# Altium PCB Constant Power Charging Board 4.5.PcbDoc
Units mm, origin at the board's own origin, x right, y up, seen from the top; angles counter-clockwise.
Board outline 99.72 x 47.55 mm, 2 copper layers (Top Layer, Bottom Layer), stack 0.533 mm thick; 62 components, 32 nets, 180 pads, 93 vias.
Unrouted connection lines stored in the file: 109.
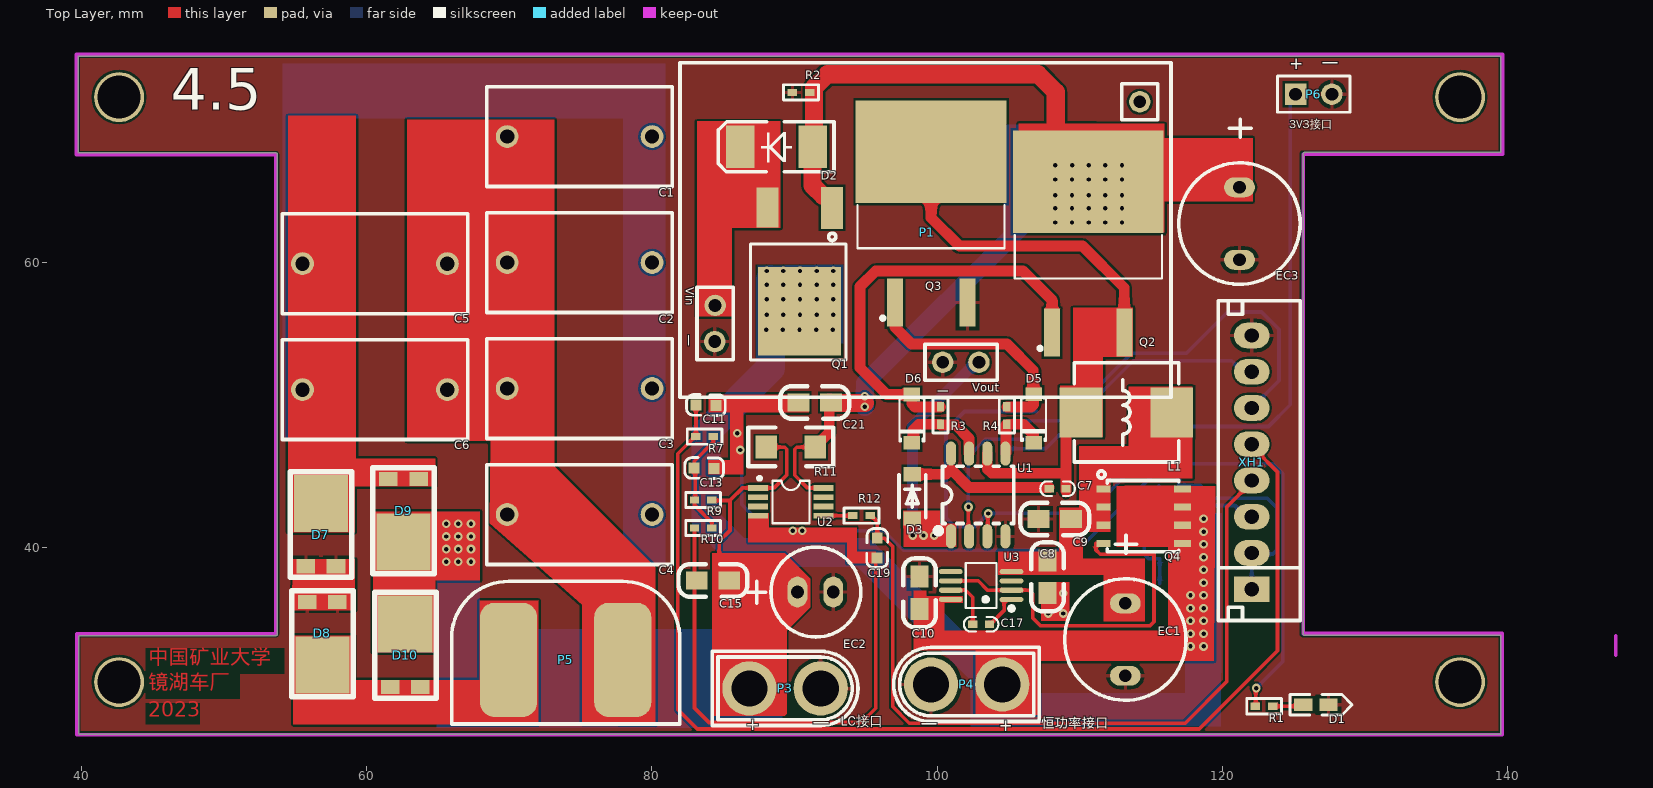
[diagram p0: Top Layer view]
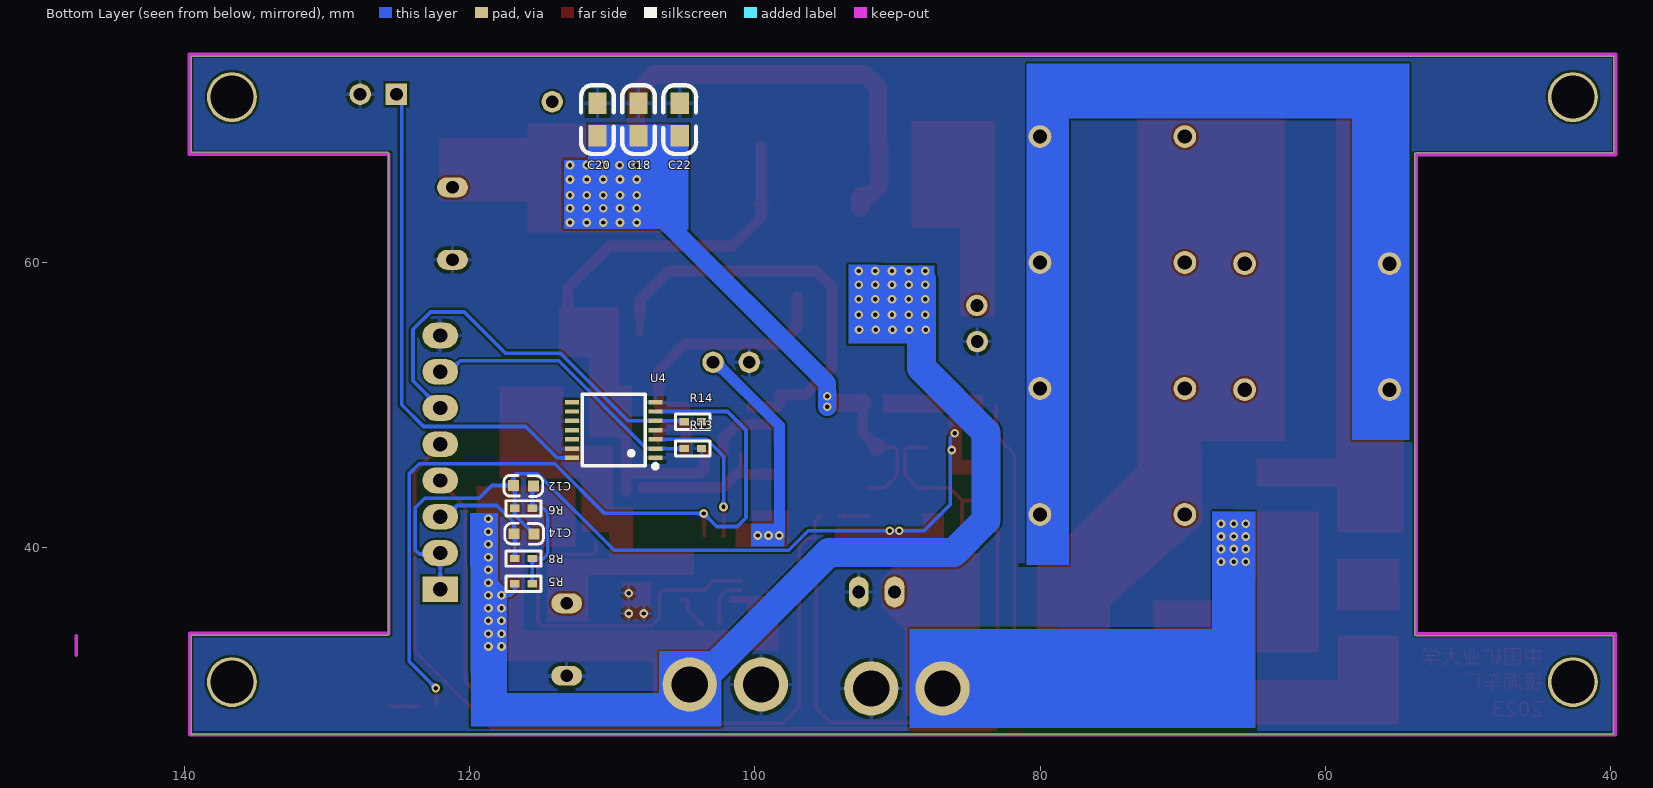
[diagram p1: Bottom Layer view, seen from below]
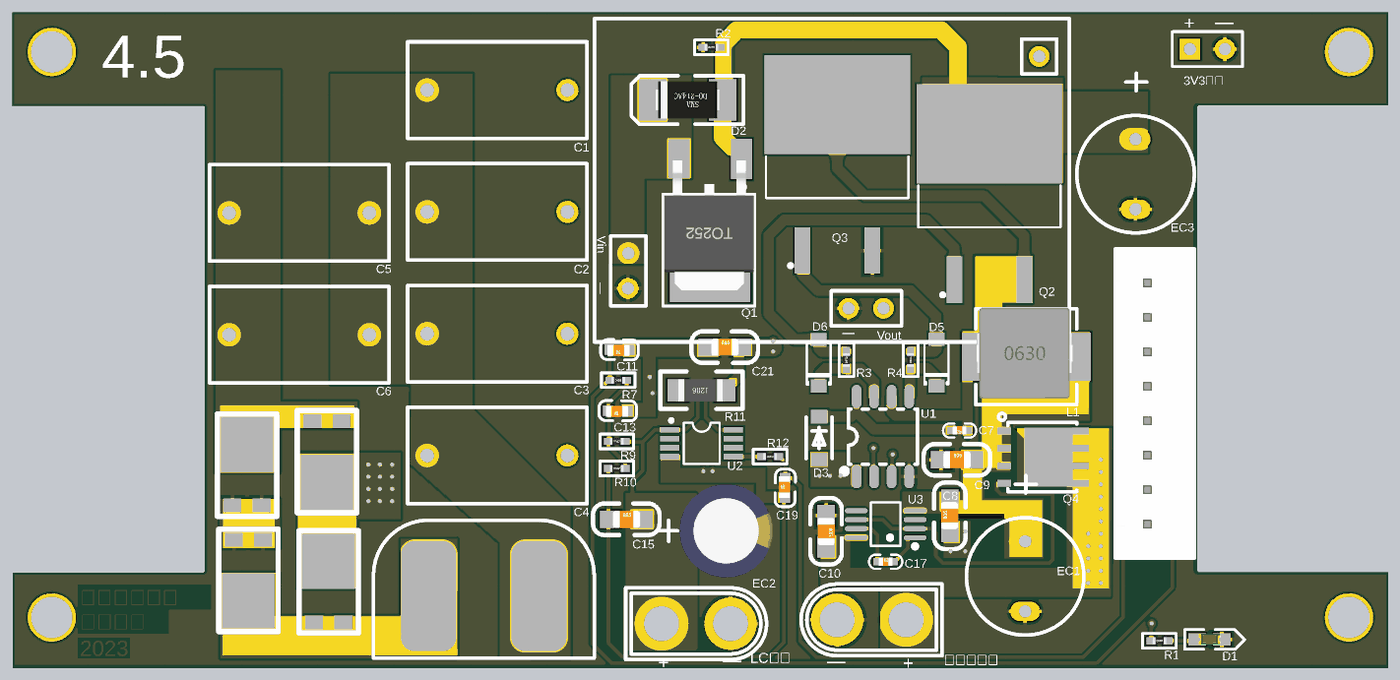
[diagram p2: 3D render of the assembled board from above, using the file's embedded part models]
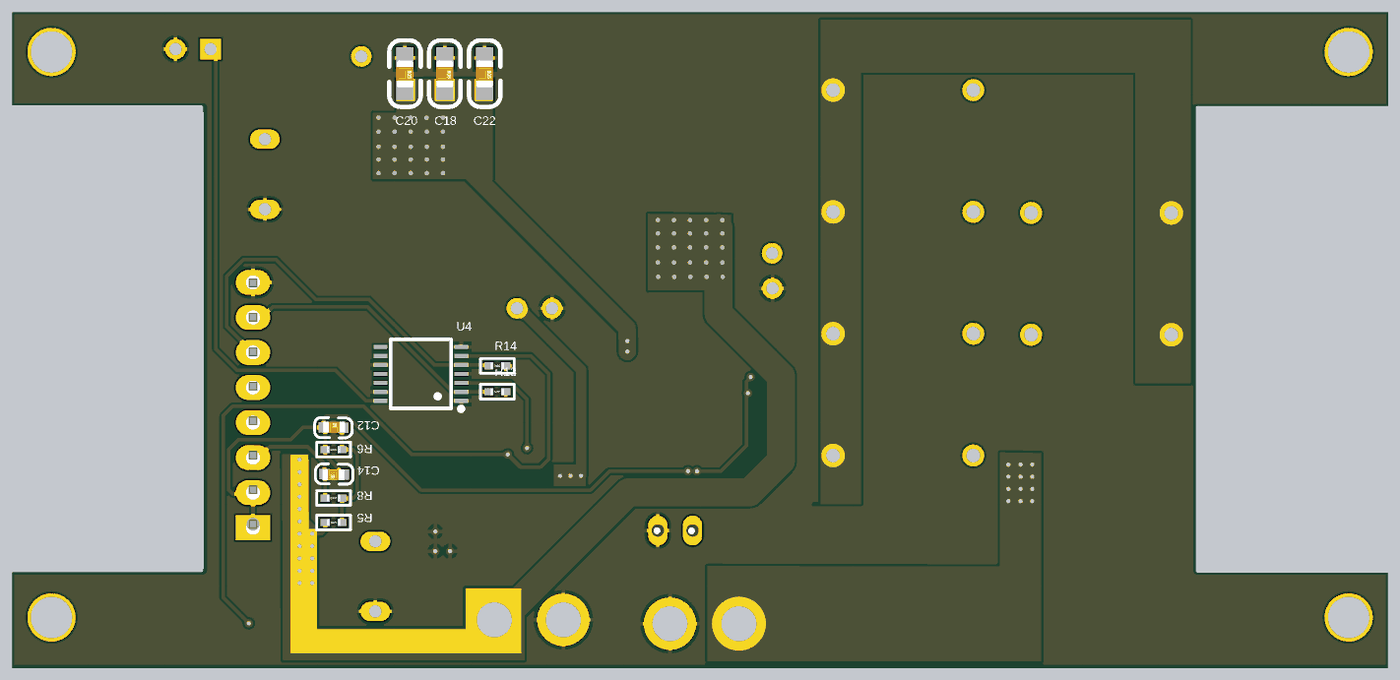
[diagram p3: 3D render of the assembled board from below, using the file's embedded part models]

## Layer stack, top to bottom
Top Solder: solder mask 0.0102, Solder Resist, Dk 3.5
Top Layer: signal copper 0.0356
Dielectric 2: prepreg 0.0711, PP-006, Dk 4.1
Dielectric 1: dielectric 0.32, FR-4, Dk 4.8
Dielectric 3: prepreg 0.0711, PP-006, Dk 4.1
Bottom Layer: signal copper 0.0356
Bottom Solder: solder mask 0.0102, Solder Resist, Dk 3.5

## Board outline
39.802,33.858 53.619,33.858 ccw(c53.619,33.985) 53.747,33.985 53.747,67.564 ccw(c53.619,67.564) 53.619,67.691 39.777,67.691 39.777,74.472 139.496,74.472 139.496,67.727 125.781,67.727 ccw(c125.781,67.6) 125.653,67.6 125.653,34 ccw(c125.781,34) 125.781,33.873 139.49,33.873 139.49,26.924 39.802,26.924

## Design rules (kind name [scope] priority, off if disabled: settings)
Clearance [All] p1: gap=0.152 ignorepadtopadclearanceinfootprint=FALSE except(0: Arc-Hole Track-Hole SMDPad-Hole THPad-Hole Via-Hole Fill-Hole Poly-Hole Region-Hole Text-Hole)
HoleToHoleClearance [All] p1: gap=0 allowstackedmicrovias=TRUE
MinimumSolderMaskSliver [All] p1: minsoldermaskwidth=0
PolygonConnect [All] p1: connectstyle=Relief reliefconductorwidth=0.254 reliefentries=4 polygonreliefangle="90 Angle" airgapwidth=0.254
RoutingVias [All] p1: holewidth=0.61 width=0.305 viastyle="Through Hole" minholewidth=0 minwidth=0 maxholewidth=1.27 maxwidth=1.27
SilkToSilkClearance [All] p1: silktosilkclearance=0
SilkToSolderMaskClearance [IsPad] p1: minsilkscreentomaskgap=0 clearancetoexposedcopper=TRUE
SolderMaskExpansion [All] p1: expansion=0.102
Width [All] p1: maxlimit=2.54 minlimit=0.102 preferedwidth=0.254 minimp=50.000000 maximp=50.000000 favimp=50.000000
26 further rules are at their usual default settings.

## Components (designator, comment, footprint, x,y, rotation, side; value= is the part's Value field where it differs from the comment)
C1 "3.3nF" "谐振电容 P=10" 74.93,68.834 r0 top
C2 "5.6nF" "谐振电容 P=10" 74.93,60.003 r0 top
C3 "5.6nF" "谐振电容 P=10" 74.93,51.173 r0 top
C4 "10nF" "谐振电容 P=10" 74.93,42.342 r0 top
C5 "12nF" "谐振电容 P=10" 60.579,59.927 r180 top
C6 "test" "谐振电容 P=10" 60.579,51.096 r180 top
C7 "1uF" 0402C 109.068,44.154 r180 top
C8 "10uF/50V" 0805C 107.712,36.85 r90 top
C9 "1uF/50V" 0805C 107.112,42.037 r0 top
C10 "10uF/50V" 0805C 98.764,37.978 r270 top
C11 "10uF" 0603C 84.486,49.978 r180 top
C12 "10uF" 0603C 116.922,44.383 r180 bottom
C13 "10uF" 0603C 84.359,45.559 r180 top
C14 "10uF" 0603C 115.463,40.961 r0 bottom
C15 "10uF/50V" 0805C 83.152,37.729 r0 top
C17 "2.2uF" 0402C 102.438,34.642 r0 top
C18 "10uF/50V" 0805C 108.135,71.153 r270 bottom
C19 "10uF" 0603C 95.762,39.288 r90 top
C20 "10uF/50V" 0805C 111.023,71.153 r270 bottom
C21 "10uF/50V" 0805C 90.284,50.204 r0 top
C22 "1uF/50V" 0805C 105.247,71.153 r270 bottom
D1 "LED" LED-0603B 125.654,29 r0 top
D2 "SS310" SMA/DO-214AC 91.135,68.123 r180 top
D3 "FR107W" FR107W 98.247,43.612 r270 top
D5 "L1N4148WT1G" L1N4148WT1G 106.756,49.073 r90 top
D6 "L1N4148WT1G" L1N4148WT1G 98.222,49.063 r90 top
D7 "FM10U100" FM10U100 56.794,40.772 r270 top
D8 "FM10U100" FM10U100 56.896,34.158 r90 top
D9 "FM10U100" FM10U100 62.586,42.769 r90 top
D10 "FM10U100" FM10U100 62.713,32.314 r270 top
EC1 "220uF 50V" DIP-EC8X12 113.182,36.119 r270 top
EC2 "100uF 50V" DIP-EC6.3X11 90.195,36.906 r0 top
EC3 "220uF 50V" DIP-EC8X12 121.183,65.278 r270 top
L1 "15uH" 0630L 110.211,49.505 r0 top
P1 "电源电路" 12V稳压电路 81.966,50.575 r0 top locked
P3 "LC接口" XT30U-M 89.332,30.15 r0 top
P4 "恒功率接口" XT30U-M 102.057,30.429 r180 top
P5 "线圈" 线圈接口 65.953,27.656 r0 top
P6 "Header 2" HDR1X2 125.12,71.806 r0 top
Q1 "AOD4189" TO252 92.507,63.839 r180 top
Q2 "HY3408B" TO-263-2L 110.592,60.373 r90 top
Q3 "HY3408B" TO-263-2L 99.568,62.49 r90 top
Q4 "TPH1R403NL_C83440" TPH1R403NL 114.428,42.227 r270 top
R1 "1k" 0402R 123.52,28.905 r180 top
R2 "10k" 0402R 89.84,71.933 r0 top
R3 "47" 0402R 100.228,48.666 r90 top
R4 "47" 0402R 104.877,48.666 r90 top
R5 "39k" 0402R 115.594,37.49 r0 bottom
R6 "2.4k" 0402R 116.813,42.774 r180 bottom
R7 "1k" 0402R 83.083,47.803 r0 top
R8 "10k" 0402R 116.813,39.251 r180 bottom
R9 "39k" 0402R 82.982,43.358 r0 top
R10 "2.4k" 0402R 82.982,41.402 r0 top
R11 "20m" 1206R 91.44,47.066 r180 top
R12 "10k" 0402R 95.301,42.266 r180 top
R13 "10k" 0402R 104.953,46.965 r180 bottom
R14 "10k" 0402R 104.953,48.844 r180 bottom
U1 "EG2104" EG2104 102.87,43.713 r0 top
U2 "AD8217BRMZ-RL" AD8217BRMZ-RL 89.738,43.231 r270 top
U3 "LM74610QDGKTQ1" LM74610QDGKTQ1 103.073,37.363 r90 top
U4 "SN74HC125PWR" sn74hc125 109.88,48.26 r90 bottom
XH1 "XH8" XH8/2.54mm/180 122.047,37.11 r90 top

## Footprints (in the part's own frame and the unit in brackets; to place one, negate y for a bottom-side part, rotate by r counter-clockwise, add the part's x,y. Pads: shape width x height; smd on the part's side, far side on the other; paste and mask are expansions set on the pad)
12V稳压电路 [mm]
  round 1.5 hole 0.9 mask+0.05: 1(2.464,6.426) 2(2.438,3.886) 3(18.415,2.438) 4(20.955,2.438) 5(32.233,20.701)
  silkscreen extent 0,0 34.42,23.44
0402C [mil]
  rect 25x20 smd: 1(2,0.16) 2(48,0.16)
  silkscreen extent -23,-20 73,20, body extent 5,-12 45,12, height 8
0402R [mil]
  rect 26x20 smd: 1(0,0) 2(48,0)
  silkscreen extent -24,-21 72,21, body extent 4,-10 43,10, height 13
0603C [mil]
  rect 30x30 smd: 1(0.21,-0.35) 2(55.21,-1.35)
  silkscreen extent -26,-30 81,28, body extent -1,-15 62,17, height 12
0630L [mm]
  rect 3x3.5 smd: 1(-0.127,0) 2(6.223,0)
  silkscreen extent -0.61,-3.48 6.71,3.48, body extent -0.55,-3.05 6.4,3.55, height 3.05
0805C [mil]
  rect 60x50 smd: 1(-0.71,-0.4) 2(89.29,-0.4)
  silkscreen extent -51,-45 139,45, body extent 6,-25 84,25, height 31
1206R [mil]
  rect 60x62.99 smd: 1(0,0) 2(135,0)
  silkscreen extent -50,-54 185,53, body extent 7,-31 133,31, height 24
AD8217BRMZ-RL [mil]
  rect 15.98x55 smd mask+2: 1(-38.39,-90.55) 2(-12.8,-90.55) 3(12.8,-90.55) 4(38.39,-90.55) 5(38.39,90.55) 6(12.8,90.55) 7(-12.8,90.55) 8(-38.39,90.55)
  silkscreen extent -70,-91 59,51
DIP-EC6.3X11 [mil]
  oval 55x85 hole 35.43: 1(0,0) 2(99,0)
  silkscreen extent -137,-124 175,124, body extent -82,-134 185,132, height 492
DIP-EC8X12 [mil]
  oval 55x85 hole 35.43: 1(0,0) 2(200,0)
  silkscreen extent -188,-167 268,168, body extent -61,-161 261,161, height 567
EG2104 [mm]
  oval 0.7x1.7 smd mask+0.051: 1(-1.905,-2.9) 2(-0.635,-2.9) 3(0.635,-2.9) 4(1.905,-2.9) 5(1.905,2.9) 6(0.635,2.9) 7(-0.635,2.9) 8(-1.905,2.9)
  silkscreen extent -2.99,-2.71 2.5,2
FM10U100 [mm]
  rect 1x1.3 smd mask+0.051: 1(2.058,1.057) 3(2.058,-1.057)
  rect 4x3.8 smd mask+0.051: 2(-2.357,0)
  silkscreen extent -4.58,-2.15 2.84,2.15
FR107W [mm]
  rect 1x1.2 smd mask+0.051: 1(-1.55,0) 2(1.55,0)
  silkscreen extent -1.52,-0.93 1.49,0.95
HDR1X2 [mm] "Connector; Header; 2 Position"
  rect 1.5x1.5 hole 0.9: 1(0,0)
  round 1.5 hole 0.9: 2(2.54,0)
  silkscreen extent -1.27,-1.27 3.81,1.27
L1N4148WT1G [mm]
  rect 0.95x1.15 smd mask+0.051: 1(-1.692,0) 2(1.692,0)
  silkscreen extent -1.58,-0.87 1.41,0.87
LED-0603B [mil]
  rect 50x35 smd: A(0,0.26) K(70,0.26)
  silkscreen extent -36,-28 135,28, body extent 4,-15 66,17, height 24
LM74610QDGKTQ1 [mm]
  oval 0.364x1.662 smd mask+0.051: 1(-0.975,-2.131) 2(-0.325,-2.131) 3(0.325,-2.131) 4(0.975,-2.131) 5(0.975,2.131) 6(0.325,2.131) 7(-0.325,2.131) 8(-0.975,2.131)
  silkscreen extent -1.76,-2.28 1.58,1.07
SMA/DO-214AC [mm] "塑封二极管"
  rect 2x3 smd: A(-0.127,0) K(4.953,0)
  silkscreen extent -1.63,-1.75 6.48,1.75, body extent 0.11,-1.35 4.71,1.35, height 2.4
sn74hc125 [mil]
  rect 12x39 smd paste+0 mask+1.97: 1(-76.77,-115.16) 2(-51.18,-115.16) 3(-25.59,-115.16) 4(0,-115.16) 5(25.59,-115.16) 6(51.18,-115.16) 7(76.77,-115.16) 8(76.77,115.16) 9(51.18,115.16) 10(25.59,115.16) 11(0,115.16) 12(-25.59,115.16) 13(-51.18,115.16) 14(-76.77,115.16)
  silkscreen extent -106,-121 98,87
TO252 [mil] "252晶体管"
  rect 230x245 smd: D(85,285.35)
  rect 60x115 smd: G(-4.55,0.23)
  rect 60x110 smd: S(173.45,-0.77)
  silkscreen extent -43,70 220,420, body extent -41,5 215,375, height 91
TO-263-2L [mil]
  rect 282.7x416 smd mask+2: D(208.11,0)
  rect 132.23x44.65 smd mask+2: G(-208.11,100) S(-208.11,-100)
  silkscreen extent -256,-203 61,203
TPH1R403NL [mm]
  rect 0.5x1 smd mask+0.05: 1(-1.906,-2.77) 2(-0.636,-2.77) 3(0.634,-2.77) 4(1.904,-2.77)
  rect 0.5x1.2 smd mask+0.05: 5(1.906,2.77) 6(0.636,2.77) 7(-0.634,2.77) 8(-1.904,2.77)
  Top Layer region: -2.125,2.2 2.125,2.2 2.125,-1.3 -2.125,-1.3 -2.125,2.2
  silkscreen extent -3.17,-3.17 2.5,2.5
XH8/2.54mm/180 [mm]
  rect 1.8x2.5 hole 1: 1(0,0)
  oval 1.8x2.5 hole 1: 2(2.54,0) 3(5.08,0) 4(7.62,0) 5(10.16,0) 6(12.7,0) 7(15.24,0) 8(17.78,0)
  silkscreen extent -2.2,-3.4 20.2,2.35, body extent -2.2,-3.4 20.2,2.35, height 7
XT30U-M [mm]
  round 3.8 hole 2.54 mask+0.05: 1(-2.5,0) 2(2.5,0)
  silkscreen extent -5.1,-2.6 5.11,2.6
线圈接口 [mm]
  rrect50% 4x8 smd mask+0.102: 1(4,4.5) 2(12,4.5)
  silkscreen extent 0,0 16,10
"谐振电容 P=10" [mm]
  round 1.6 hole 1 paste+0 mask+0.051: 1(-5.08,0) 2(5.08,0)
  silkscreen extent -6.5,-3.5 6.5,3.5

## Part data
C1 C2 C3 C4 C5 C6 C7 C8 C9 C10 C11 C12 C13 C14 C15 C17 C18 C19 C20 C21 C22: library part CAP, "无极性电容"
D2: library part "DIODE SCHOTTKY", "肖特基二极管"
D3: Average Rectified Current (Io)=1A, Forward Voltage (Vf@If)=1.3V@1A, JLCPCB Part Class="Extended Part", LCSC Part Name="1kV 1A 500ns", Manufacturer=SHIKUES(时科, Operating Temperature=-55℃~+150℃@(Tj, Reverse Leakage Current=5uA@1kV, Reverse Voltage (Vr)=1kV, Add into BOM=yes, Convert to PCB=yes, Datasheet=https://atta.szlcsc.com/upload/public/pdf/source/20170721/C122857_1500622641666834601.pdf, Device=FR107W_C122857, Diode Configuration=独立, Manufacturer Part=FR107W, Name=FR107W, Reverse Recovery Time (trr)=500ns, Supplier=LCSC, Supplier Footprint=SOD-123F, Supplier Part=C122857, Symbol=FR107W_C122857
D5 D6: JLCPCB Part Class="Extended Part", Manufacturer=LRC(乐山无Ï, Add into BOM=yes, Convert to PCB=yes, Datasheet=https://atta.szlcsc.com/upload/public/pdf/source/20180130/C78089_15172974696991323502.pdf, Device=L1N4148WT1G, LCSC Part Name=L1N4148WT1G, Manufacturer Part=L1N4148WT1G, Name=L1N4148WT1G, Supplier=LCSC, Supplier Footprint=SOD-123, Supplier Part=C78089, Symbol=L1N4148WT1G
EC1 EC2 EC3: library part DIP_ECAP, "直插电解电容"
L1: library part INDUCTOR, "INDUCTOR"
P1: library part "Header 5", "Header, 5-Pin", LatestRevisionDate=17-Jul-2002, LatestRevisionNote="Re-released for DXP Platform.", Publisher="Altium Limited"
P3 P4 P5: library part "Header 2", "Header, 2-Pin", LatestRevisionDate=17-Jul-2002, LatestRevisionNote="Re-released for DXP Platform.", Publisher="Altium Limited"
P6: "Header, 2-Pin", LatestRevisionDate=17-Jul-2002, LatestRevisionNote="Re-released for DXP Platform.", Publisher="Altium Limited"
Q1: library part P-MOS, "P沟道场效应管"
Q2 Q3: library part N-MOS, "N沟道场效应管"
Q4: library part TPH1R403NL, Continuous Drain Current (Id)=150A, Drain Source On Resistance (RDS(on)@Vgs,Id)=1.4mΩ@10V,30A, Drain Source Voltage (Vdss)=30V, Gate Threshold Voltage (Vgs(th)@Id)=2.3V@500uA, JLCPCB Part Class="Extended Part", LCSC Part Name="N沟道 30V 150", Manufacturer=TOSHIBA(东芝, Power Dissipation (Pd)=64W, Add into BOM=yes, Convert to PCB=yes, Datasheet=https://atta.szlcsc.com/upload/public/pdf/source/20170908/C83440_1504870121708958077.pdf, Device=TPH1R403NL_C83440, Manufacturer Part=TPH1R403NL, Name=TPH1R403NL, Supplier=LCSC, Supplier Footprint=DSOP-8-EP-5.0mm, Supplier Part=C83440, Symbol=TPH1R403NL, Type=N¹µµ
R1 R2 R3 R4 R5 R6 R7 R8 R9 R10 R11 R12 R13 R14: library part RES
U1: JLCPCB Part Class="Extended Part", Manufacturer=EG(ÒÙ¾§Î, Add into BOM=yes, Convert to PCB=yes, Datasheet=https://atta.szlcsc.com/upload/public/pdf/source/20220627/4CCFA0CAB664067FEE4AF87E4129127F.pdf, Device=EG2104, LCSC Part Name=EG2104, Manufacturer Part=EG2104, Name=EG2104, Supplier=LCSC, Supplier Footprint=SOP-8-150mil, Supplier Part=C186697, Symbol=EG2104
U2: JLCPCB Part Class="Extended Part", Manufacturer=ADI(ÑÇµÂÅµ)/LINEAR(Á, Add into BOM=yes, Convert to PCB=yes, Datasheet=https://atta.szlcsc.com/upload/public/pdf/source/20210917/AF3C106AEC076886B195CA793BFB0934.pdf, Device=AD8217BRMZ-RL, LCSC Part Name=AD8217BRMZ-RL, Manufacturer Part=AD8217BRMZ-RL, Name=AD8217BRMZ-RL, Supplier=LCSC, Supplier Footprint=MSOP-8, Supplier Part=C652512, Symbol=AD8217BRMZ-RL
U3: JLCPCB Part Class="Extended Part", Manufacturer=TI(德州仪, Add into BOM=yes, Convert to PCB=yes, Datasheet=https://atta.szlcsc.com/upload/public/pdf/source/20180404/C202259_70E4B7C153C462264F43194A5B82116A.pdf, Device=LM74610QDGKTQ1, LCSC Part Name=LM74610QDGKTQ1, Manufacturer Part=LM74610QDGKTQ1, Name=LM74610QDGKTQ1, Supplier=LCSC, Supplier Footprint=VSSOP-8-0.65, Supplier Part=C202259, Symbol=LM74610QDGKTQ1
U4: Current - Output High, Low=7.8mA、7.8mA, JLCPCB Part Class="Extended Part", Manufacturer=TI(德州仪, Operating Temperature=-40℃~+85℃（T, Voltage - Supply="2V ~ 6V", Add into BOM=yes, Convert to PCB=yes, Datasheet=https://atta.szlcsc.com/upload/public/pdf/source/20170930/C132994_1506736365150997346.pdf, Device=SN74HC125PWR, Input Type=-, LCSC Part Name=SN74HC125PWR, Logic Type=缓冲器，, Manufacturer Part=SN74HC125PWR, Name=SN74HC125PWR, Number of Bits per Element=1, Number of Elements=4, Output Type=ÈýÌ, Series=74HC, Supplier=LCSC, Supplier Footprint=TSSOP-14, Supplier Part=C132994, Symbol=SN74HC125PWR

## Free pads (board coordinates)
  round 3.5 hole 3 mask+0.05: 2(42.649,30.6) 2(42.649,71.6) 2(136.649,30.6) 2(136.649,71.6)

## Via types
v1: diameter 0.61, hole 0.305, Top Layer to Bottom Layer, tented both sides, 93 vias

## Nets (pads, with @x,y where several pads share a name; then routed paths per layer and width w, separated by ;. In a path a pad name is that pad's centre, name@x,y a point inside that pad or via, vN(x,y) a via of type N, cw(c..) or ccw(c..) an arc to the next point about the centre after c; other vN are vias at no path point)
3V3: P6.1 U4.14 | length 35.4
  Bottom Layer w0.254: U4.14 113.848,46.31 116.052,48.514 123.215,48.514 124.739,50.038 124.739,71.425 P6.1
12V: D3.2 P1.4 U1.1 | length 14.3
  Bottom Layer w0.762: v1(98.273,40.869) 98.273,48.565 P1.4@102.921,53.213
  other v1: 99.035,40.869 99.797,40.869
AGND: C11.1 C12.1 C13.1 C14.1 C15.1 C19.1 C21.1 R6.1 R10.1 U2.4 XH1.1 XH1.2 | length 95.6
  Top Layer w0.254: R10.1 82.982,28.778 83.998,27.762 94.691,27.762 95.694,28.765 95.694,38.887 ; C21.1@90.061,49.966 C21.1@90.289,50.195
  Bottom Layer w0.254: v1(85.979,48.031) 86.297,47.714 86.297,43.041 88.139,41.199 96.241,41.199 97.612,39.827 109.841,39.827 115.2,45.187 116.738,45.187 116.916,45.009 C12.1 ; C14.1 116.813,42.315 R6.1 116.813,44.271 C12.1 ; XH1.1@122.047,36.772 122.047,39.272 122.343,39.568 123.519,39.568 123.8,39.849 123.8,42.824 123.139,43.485 119.329,43.485 118.44,44.374 C12.1
  other v1: 89.865,41.199 90.526,41.199 86.182,46.863
IN: R13.1 U4.2 XH1.7 | length 20
  Bottom Layer w0.254: R13.1 104.955,46.962 106.953,46.962 U4.2 107.59,46.96 113.741,53.111 120.647,53.111 121.408,52.35 XH1.7
IN': U1.2 U4.3 | length 10.9
  Top Layer w0.254: v1(102.184,42.875) 102.184,40.864 U1.2
  Bottom Layer w0.254: v1(102.184,42.875) 102.184,46.431 103.363,47.61 U4.3
MOS_G: Q4.4 U3.2 U3.6 | length 26
  Top Layer w0.254: U3.6 102.875,37.689 103.525,37.039 U3.2 106.421,37.039 106.705,36.754 106.705,35.077 107.239,34.544 114.91,34.544 115.189,34.823 115.189,39.548 111.43,39.548 111.125,39.853 111.125,40.31
MOS_S: C8.2 C9.2 EC1.1 L1.2 Q4.1 Q4.2 Q4.3 U3.4
NetC1_2: C1.2 C2.2 C3.2 C4.2 C5.2 C6.2 D7.2 D9.1 D9.3
NetC7_1: C7.1 L1.1 Q2.S Q3.D U1.6 | length 37
  Top Layer w0.254: 109.017,43.663 C7.1@109.017,43.993 ; L1.1@109.017,48.438 L1.1
  Top Layer w0.762: Q3.D@99.568,68.176 99.568,63.144 101.549,61.163 110.185,61.163 113.106,58.242 113.106,55.113 Q2.S ; U1.6 103.505,45.542 103.817,45.23 108.973,45.23 109.017,45.187 ; C7.1 109.017,43.993 L1.1@109.017,48.438 ; L1.1 L1.1@110.109,49.53
NetC7_2: C7.2 D3.1 U1.8 | length 11.4
  Top Layer w0.254: 100.965,45.517 U1.8
  Top Layer w0.762: D3.1 100.61,45.162 100.965,45.517 102.235,44.247 C7.2@107.848,44.247
NetC12_2: C12.2 R5.1 R6.2 R8.2 | length 8.7
  Bottom Layer w0.254: C12.2 115.594,44.274 R6.2 114.808,42.774 114.503,42.469 114.503,39.548 114.8,39.251 R8.2 R5.1
NetC13_2: C13.2 R7.2 R9.1 R10.2 | length 7.5
  Top Layer w0.254: C13.2 82.956,46.076 84.303,47.422 R7.2 ; C13.2@83.033,45.593 83.033,43.409 R9.1 82.982,43.002 84.201,41.783 R10.2
NetC17_1: C17.1 U3.7 | length 3.7
  Top Layer w0.254: U3.7 102.001,37.039 102.489,36.551 C17.1
NetC17_2: C17.2 U3.1 | length 2.7
  Top Layer w0.254: C17.2 103.721,34.646 104.682,35.607 104.682,36.337 104.733,36.388 U3.1
NetD1_A: D1.A R1.1 | length 2.2
  Top Layer w0.254: R1.1 125.552,28.905 D1.A
NetD5_1: D5.1 R4.1 U1.5 | length 4.8
  Top Layer w0.254: U1.5 U1.5@104.826,46.664 ; R4.1@104.826,48.616 R4.1 ; D5.1 106.756,47.955
  Top Layer w0.762: U1.5@104.826,46.664 R4.1@104.826,48.616 ; R4.1 106.045,48.666 106.756,47.955
NetD5_2: D5.2 Q3.G R4.2 | length 17.4
  Top Layer w0.508: D5.2@106.731,50.791 D5.2
  Top Layer w0.762: Q3.G@97.028,57.605 97.028,55.474 98.196,54.305 104.877,54.305 106.731,52.451 D5.2@106.731,50.791 ; R4.2 106.578,49.886 106.756,50.063 D5.2
NetD6_1: D6.1 R3.1 U1.7 | length 6.6
  Top Layer w0.254: D6.1 D6.1@98.322,47.371 ; R3.1@100.228,48.612 R3.1
  Top Layer w0.762: D6.1@98.322,47.371 98.322,48.284 98.704,48.666 R3.1 ; R3.1@100.228,48.612 101.299,48.612 102.235,47.676 U1.7
NetD6_2: D6.2 Q2.G R3.2 | length 30
  Top Layer w0.254: R3.2@100.228,49.809 R3.2
  Top Layer w0.508: Q2.G Q2.G@108.052,56.2
  Top Layer w0.762: R3.2 98.45,49.886 98.222,50.114 D6.2 96.463,50.756 94.59,52.629 94.59,58.318 95.688,59.417 106.013,59.417 108.052,57.379 Q2.G@108.052,56.2
NetR12_2: R12.2 U2.5 | length 2.1
  Top Layer w0.254: U2.5@92.059,42.235 U2.5 92.043,42.261 94.077,42.261 R12.2
PGND: C8.1 C9.1 C10.1 C18.1 C20.1 C22.1 D1.K D7.1 D7.3 D8.1 D8.3 EC1.2 EC2.2 EC3.2 P1.2 P1.3 P3.2 P4.2 P6.2 Q3.S R2.1 R13.2 R14.2 U1.4 U4.1 U4.4 U4.7 U4.10 U4.13 XH1.8
  other v1: 107.772,35.408 108.839,35.408 108.839,36.83
Ri: C19.2 R12.1 XH1.4 | length 54.1
  Top Layer w0.254: R12.1 95.377,42.266 95.796,41.846 C19.2 96.291,40.691 96.876,40.107 96.876,28.88 98.044,27.711 117.373,27.711 120.294,30.632 120.294,42.87 121.697,44.272 XH1.4@122.047,44.272
Rv: C11.2 R7.1 XH1.5 | length 81.7
  Top Layer w0.254: C11.2 R7.1 83.007,47.803 81.813,46.609 81.813,28.677 83.185,27.305 118.364,27.305 123.85,32.791 123.85,45.319 122.397,46.772 XH1.5@122.047,46.772
Rv1: C14.2 R8.1 XH1.3 | length 8.5
  Bottom Layer w0.254: R8.1 116.813,40.943 C14.2 116.865,41.758 118.085,42.977 120.853,42.977 XH1.3@121.895,41.935
SD: R14.1 U4.5 XH1.6 | length 29.7
  Top Layer w0.254: XH1.6@122.406,49.272 XH1.6@122.631,49.047
  Bottom Layer w0.254: R14.1 105.019,48.91 U4.5 108.879,48.91 113.614,53.645 117.475,53.645 120.371,56.54 122.733,56.54 123.952,55.321 123.952,51.715 XH1.6 ; XH1.6@122.047,49.272 XH1.6@122.397,49.272
SD': R1.2 U1.3 U4.6 | length 57.7
  Top Layer w0.254: U1.3 103.543,40.852 103.543,42.38 v1(103.581,42.418) ; R1.2 122.326,28.931 122.326,30.15 v1(122.352,30.175)
  Bottom Layer w0.254: U4.6 101.909,49.56 100.609,48.26 100.609,42.113 101.219,41.504 102.667,41.504 v1(103.581,42.418) 110.531,42.418 114.022,45.909 123.509,45.909 124.206,45.212 124.206,32.029 v1(122.352,30.175)
V_AC+: C1.1 C2.1 C3.1 C4.1 C5.1 C6.1 P5.2
V_AC-: D8.2 D10.1 D10.3 P5.1
VCAP: C10.2 P4.1 Q1.D Q4.5 Q4.6 Q4.7 Q4.8 R5.2 U3.8 | length 45.8
  Bottom Layer w0.254: R5.2 116.813,36.959 117.099,36.673 v1(117.754,36.673)
  Bottom Layer w1.27: P4.1@103.99,30.429 P4.1
  Bottom Layer w2.032: 88.303,58.826 88.303,52.616 83.795,48.108 83.795,41.935 86.055,39.675 94.82,39.675 P4.1@103.939,30.556
  other v1: 117.754,33.096 118.669,33.096 117.754,33.99 118.669,33.99 117.754,34.884 118.669,34.884 117.754,35.778 118.669,35.778 118.669,36.673 118.669,37.567 118.669,38.461 118.669,39.355 118.669,40.249 118.669,41.143 118.669,42.037 88.011,55.296 89.179,55.296 90.348,55.296 91.516,55.296 92.685,55.296 88.036,56.337 89.205,56.337 90.373,56.337 91.542,56.337 92.71,56.337 88.036,57.429 89.205,57.429 90.373,57.429 91.542,57.429 92.71,57.429 88.036,58.445 89.205,58.445 90.373,58.445 91.542,58.445 92.71,58.445 88.036,59.411 89.205,59.411 90.373,59.411 91.542,59.411 92.71,59.411
VCC: C18.2 C20.2 C21.2 C22.2 D2.A EC3.1 Q1.G Q2.D R2.2 R11.1 U2.8 | length 64.2
  Top Layer w0.254: R11.1 90.17,47.066 90.018,46.914 90.018,45.085 90.897,44.206 U2.8
  Top Layer w0.762: R11.1@91.44,47.104 92.425,48.089 C21.2@92.425,50.193
  Top Layer w1.27: R11.1 R11.1@91.44,47.104 ; C21.2@92.425,50.193 92.755,50.168 v1@94.92,50.168 ; Q1.G 92.622,64.532 92.495,64.659 92.006,64.659 91.262,65.403 D2.A 91.364,68.224 91.364,72.263 92.304,73.203 107.061,73.203 108.306,71.958 108.306,67.945 Q2.D
  Bottom Layer w1.27: v1(94.92,49.886) v1(94.92,50.635) 94.945,51.562 106.528,63.144
  other v1: 108.28,62.814 109.449,62.814 110.617,62.814 111.785,62.814 112.954,62.814 108.28,63.805 109.449,63.805 110.617,63.805 111.785,63.805 112.954,63.805 108.28,64.729 109.449,64.729 110.617,64.729 111.785,64.729 112.954,64.729 108.28,65.821 109.449,65.821 110.617,65.821 111.785,65.821 112.954,65.821 108.28,66.837 109.474,66.827 110.617,66.837 111.785,66.837 112.954,66.837
VDRIVE: D2.K P1.1 Q1.S
VIN: C15.2 D9.2 D10.2 EC2.1 P3.1 R9.2 R11.2 U2.1 | length 14.8
  Top Layer w0.254: R9.2 84.234,43.325 85.463,43.325 ; 84.383,39.229 84.619,39.229 84.709,39.319 84.709,40.462 85.471,41.224 85.471,43.332 86.345,44.206 U2.1 88.554,44.206 89.459,45.11 89.459,46.917 89.31,47.066 R11.2 ; C15.2@84.754,38.109 84.754,38.947
  other v1: 65.583,39.035 66.421,39.035 67.31,39.035 65.583,39.919 66.421,39.919 67.31,39.919 65.583,40.803 66.421,40.803 67.31,40.803 65.583,41.686 66.421,41.686 67.31,41.686
pads on no net: P1.5 U2.2 U2.3 U2.6 U2.7 U3.3 U3.5 U4.8 U4.9 U4.11 U4.12

## Polygon pours and split planes (outlines as drawn)
no net on Bottom Overlay (solid): 43.612,12.395
PGND on Top Layer "Top Layer-PGND" (solid, remove dead copper, pour order 6): 39.649,74.701 139.624,74.701 139.624,26.905 139.618,26.899 39.675,26.899
PGND on Bottom Layer "Bottom Layer-PGND" (solid, remove dead copper, pour order 8): 39.649,74.701 139.624,74.701 139.618,74.695 139.618,26.899 39.675,26.899

## Keep-outs
Keep-Out Layer:
  lines w0.254: 139.624,68.809 139.624,67.6 ; 147.555,32.465 147.555,33.848 ; 139.624,67.6 139.624,74.6 39.649,74.6 39.649,67.564 53.619,67.564 53.619,33.985 39.675,33.985 39.675,26.899 139.618,26.899 139.618,34 125.654,34 125.654,67.6 139.624,67.6

## Other copper
Top Layer:
  region net VIN: 84.226,39.624 84.226,28.372 84.379,28.219 89.306,28.219 89.459,28.372 89.433,28.804 89.433,34.188 91.084,35.839 91.084,37.846 89.306,39.624
  region net VIN: 84.226,39.624 86.055,39.624 86.055,38.506
  region net VCAP: 100.482,36.144 101.803,36.144 101.803,36.627 99.212,36.627 99.212,36.982 98.361,36.982 98.361,32.855 98.4,32.893 102.692,32.893 102.692,28.346 102.718,28.321 107.137,28.321 107.137,32.08 119.39,32.08 119.39,44.242 119.47,44.323 119.454,44.339 112.595,44.339 112.595,40.089 116.205,40.089 116.205,34.188 110.871,34.188 100.482,34.188
  region net NetC7_1: 113.716,56.845 113.69,56.82 109.525,56.82 109.525,51.46 109.525,51.359 108.636,51.359 108.636,47.803 108.61,47.777 111.608,47.777 111.608,53.391 113.716,53.391
  region net VCC: 105.715,69.748 105.715,69.266 105.715,62.128 115.926,62.128 115.926,64.287 122.098,64.287 122.098,68.732 115.926,68.732 115.926,69.723 111.125,69.723 111.15,69.748
  region net 12V: 97.612,42.596 100.178,42.596 100.178,41.681 101.321,41.681 101.321,40.081 97.637,40.081
  region net PGND: 54.832,39.192 59.182,39.192 59.182,35.636 54.797,35.636
  region net V_AC-: 54.864,33.858 59.106,33.858 59.106,30.734 67.92,30.734 67.92,36.297 71.958,36.297 72.034,36.297 72.034,36.322 72.034,27.635 54.864,27.635
  region: 74.498,27.661
  region net PGND: 107.29,37.592 107.29,34.9 109.245,34.9 109.245,37.592
  region net AGND: 86.754,42.418 86.754,40.386 93.688,40.386 93.688,38.913 95.694,38.913 95.694,39.726 94.348,39.726 94.348,41.427 88.176,41.427 88.176,42.418
  region net AGND: 83.972,50.749 91.008,50.749 91.008,49.505 86.411,49.505 86.411,45.161 83.947,45.161 83.947,46.152 85.496,46.152 85.496,49.505 83.972,49.505
  region: 84.074,50.419
  region net VCAP: 112.674,44.323 119.47,44.323 119.39,32.842 101.739,32.842 98.361,32.842 98.361,36.982 99.212,36.982 99.212,36.627 101.803,36.627 101.803,36.144 100.482,36.144 100.482,34.188 116.205,34.188 116.205,40.089 112.674,40.089
  region net MOS_S: 104.267,38.113 111.658,38.113 111.658,34.861 114.529,34.861 114.529,39.23 110.211,39.23 110.211,41.148 112.141,41.148 112.141,44.869 117.881,44.869 117.881,51.295 113.436,51.295 113.436,47.117 112.992,47.117 109.957,47.117 109.957,42.799 108.534,42.799 108.534,39.726 104.267,39.726
  region: 114.935,51.308
  region net VDRIVE: 83.16,56.236 85.598,56.236 85.598,56.312 85.598,62.433 88.976,62.433 89.002,62.459 89.002,69.901 83.16,69.901
  region: 85.141,69.672
  region net VIN: 60.452,32.69 64.795,32.69 64.795,36.195 64.795,36.322 64.795,37.719 67.945,37.719 67.945,42.545 60.452,42.545
  region net NetC1_2: 54.508,70.282 54.508,41.097 59.157,41.097 59.157,44.323 64.795,44.323 64.795,46.253 59.233,46.253 59.233,46.279 59.233,46.33 59.233,70.282
  region net V_AC+: 75.108,27.665 80.239,27.61 80.239,38.633 73.146,45.726 73.146,70.028 62.84,70.028 62.84,47.498 68.691,47.498 68.62,41.737 75.108,36.017
  text "中国矿业大学" at 44.68,31.496 h1.8
  text "镜湖车厂" at 44.682,29.726 h1.8
  text "2023" at 44.679,27.813 h1.8
Bottom Layer:
  region net VCC: 104.673,69.672 104.673,62.332 104.75,62.255 104.877,62.382 113.36,62.382 113.36,67.183 113.335,67.208 113.309,67.183 111.658,67.183 111.658,69.621 111.684,69.647
  region net VCAP: 87.376,59.792 87.401,59.766 87.401,54.331 93.396,54.331 93.421,54.305 93.421,59.868
  region net VCAP: 119.94,42.443 118.008,42.443 118.008,37.694 117.399,37.084 117.399,29.87 117.348,29.82 106.68,29.82 106.68,32.741 102.362,32.741 102.362,27.483 119.887,27.483
  region net 12V: 100.241,40.107 97.917,40.107 97.917,41.707 100.258,41.707
  region net VIN: 64.922,42.52 64.922,27.991 64.922,27.407 89.129,27.407 89.129,33.122 89.129,34.341 67.92,34.29 67.92,42.545 67.894,42.57
  region net NetC1_2: 77.978,38.811 81.407,38.811 80.924,38.811 80.924,39.345 80.924,73.939 54.102,73.939 54.102,47.574 58.115,47.574 58.115,70.104 77.978,70.104

## Silkscreen, mask and mechanical layers (free items; w line width, h text height)
Top Overlay:
  text "—" at 126.949,73.33 h1.5
  text "+" at 124.689,73.254 h1.5
  text "4.5" at 46.253,69.748 h5
  text "3V3接口" at 124.663,69.215 h1
  text "LC接口" at 93.243,27.305 h1.2
  text "恒功率接口" at 107.29,27.153 h1.2
  text "—" at 91.288,27.076 h1.5
  text "—" at 98.831,27 h1.5
  text "+" at 86.589,26.899 h1.5
  text "+" at 104.318,26.848 h1.5
Top Solder:
  region: 112.357,44.298 119.253,44.298 119.253,44.196 119.253,32.69 116.637,32.69 116.637,40.044
  region: 117.831,51.257 113.538,51.257 113.538,46.965 113.513,46.99 110.058,46.99 110.058,42.52 108.661,42.52 108.661,39.141 108.661,39.116 108.661,39.091 107.264,39.091 107.264,38.278 107.264,37.77 112.039,37.77 112.039,35.001 112.065,34.976 114.427,34.976 114.427,39.091 110.058,39.091 110.058,40.945 110.058,41.453 111.481,41.453 111.481,45.314 117.779,45.314
  region: 113.703,56.794 109.576,56.794 109.576,51.283 108.636,51.283 108.636,47.777 111.506,47.777 111.506,53.442 113.728,53.442
  region: 64.567,45.974 54.839,45.974 54.839,41.199 59.131,41.199 59.131,44.323 64.567,44.323
  region: 60.458,42.469 64.722,42.469 64.722,32.639 60.5,32.639
  region: 55.067,39.243 55.067,35.636 58.801,35.636 58.801,39.243
  region: 55.09,33.68 55.016,27.864 72.06,27.864 72.06,30.683 58.776,30.683 58.776,33.68
  lines w1.27: 92.126,64.541 91.262,65.405 91.262,65.698 91.262,72.124 92.278,73.177 107.086,73.177 ; 108.331,68.047 108.331,71.958 107.112,73.177 ; 107.086,73.177 107.112,73.177 ; 107.086,73.177 107.112,73.177 ; 107.086,73.177 107.112,73.177
Bottom Solder:
  region: 118.034,42.418 119.329,42.418 119.329,42.316 119.329,27.991 102.616,27.991 102.616,32.69 106.629,32.69 106.629,29.743 117.399,29.743 117.399,37.033 118.008,37.033

## Text inside footprints (layer, text, board x,y; h text height)
P1: Top Overlay "Vout" at 102.438,50.752 h1; Top Overlay "Vin" at 82.169,58.271 h1 r270; Top Overlay "—" at 100.813,51.413 h1 r180; Top Overlay "—" at 82.169,54.943 h1 r270